# EAGLE board brain_badge (EAGLE 9.5.2)
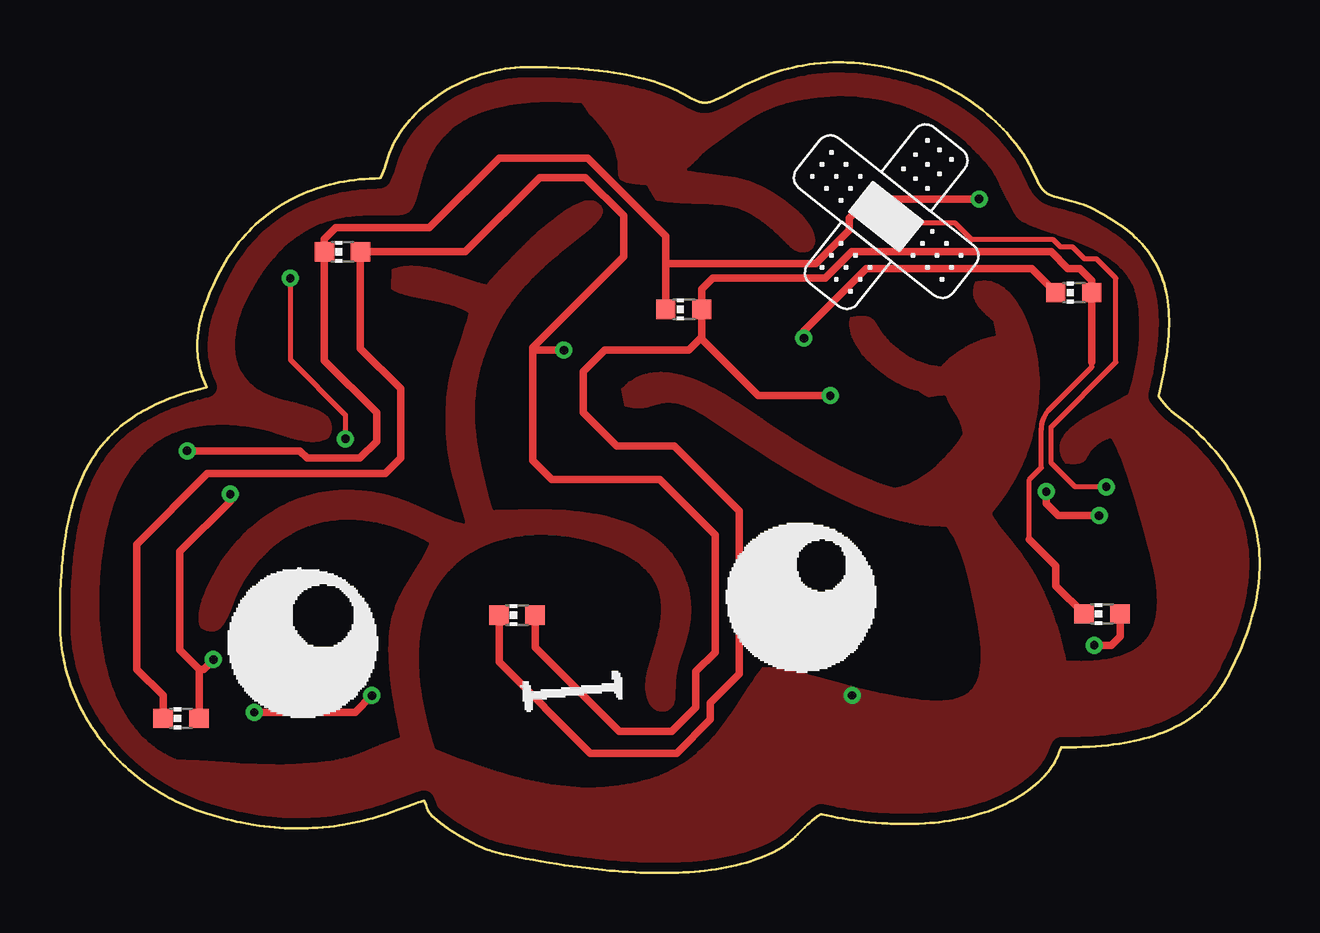
[diagram p0: board, top side]
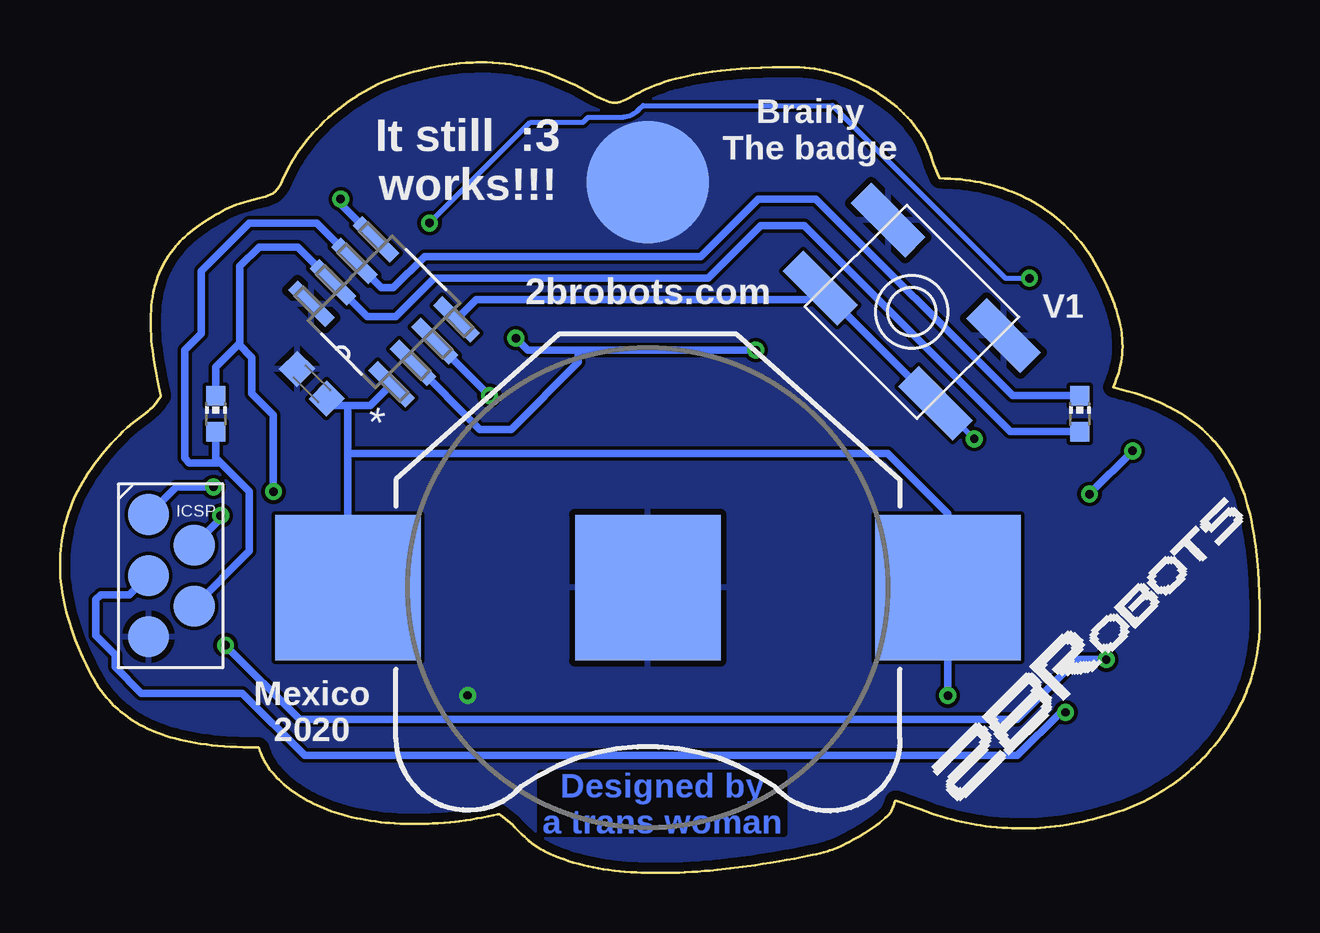
[diagram p1: board, bottom side, seen from below]

Size 49.99 x 33.79 mm. Coordinates in mm from the lower left corner, seen from the top.
Outline: 26.87,32.11 26.82,32.11 26.77,32.12 26.72,32.13 26.66,32.14 26.61,32.16 26.51,32.19 26.42,32.24 26.32,32.29 26,32.46 25.86,32.54 25.72,32.61 25.57,32.68 25.38,32.76 25.18,32.84 24.98,32.91 24.78,32.98 24.58,33.04 24.33,33.11 24.12,33.16 23.86,33.22 23.6,33.28 23.34,33.32 23.08,33.36 22.82,33.4 22.45,33.45 22.03,33.49 21.61,33.52 21.24,33.55 20.76,33.57 20.29,33.58 19.86,33.59 19.39,33.59 19.18,33.59 18.96,33.57 18.75,33.55 18.54,33.52 18.34,33.49 18.13,33.44 17.92,33.39 17.72,33.34 17.52,33.27 17.32,33.21 17.12,33.13 16.92,33.05 16.73,32.96 16.54,32.87 16.35,32.77 16.17,32.67 15.98,32.56 15.81,32.45 15.63,32.33 15.46,32.2 15.29,32.07 15.13,31.94 14.97,31.8 14.82,31.65 14.67,31.5 14.57,31.38 14.47,31.26 14.37,31.13 14.3,31.05 14.24,30.96 14.15,30.83 14.07,30.7 13.99,30.56 13.93,30.47 13.89,30.37 13.84,30.28 13.8,30.18 13.76,30.08 13.73,29.98 13.58,29.53 13.52,29.38 13.48,29.28 13.42,29.14 13.36,28.99 13.33,28.96 13.11,28.96 12.9,28.95 12.69,28.94 12.48,28.92 12.27,28.89 12.06,28.87 11.85,28.83 11.64,28.79 11.44,28.75 11.23,28.7 11.08,28.65 10.88,28.59 10.67,28.53 10.47,28.46 10.33,28.4 10.13,28.32 9.94,28.23 9.75,28.14 9.61,28.06 9.42,27.96 9.24,27.85 9.11,27.77 8.93,27.65 8.76,27.53 8.59,27.4 8.46,27.3 8.3,27.17 8.14,27.03 7.99,26.88 7.88,26.77 7.73,26.61 7.59,26.46 7.46,26.29 7.36,26.17 7.23,26 7.11,25.82 7,25.65 6.89,25.47 6.78,25.28 6.68,25.1 6.54,24.81 6.38,24.48 6.25,24.19 6.15,23.94 6.07,23.75 6.02,23.6 5.98,23.5 5.95,23.4 5.91,23.24 5.85,23.04 5.81,22.83 5.78,22.68 5.75,22.52 5.74,22.41 5.73,22.31 5.72,22.2 5.72,22.1 5.72,21.94 5.72,21.78 5.73,21.62 5.75,21.46 5.77,21.31 5.8,21.15 5.83,21.05 5.85,20.95 5.88,20.84 5.91,20.74 5.97,20.59 6.03,20.45 6.07,20.35 6.11,20.25 6.07,20.24 5.76,20.16 5.45,20.08 5.2,20 4.9,19.9 4.75,19.85 4.6,19.79 4.35,19.69 4.11,19.59 3.97,19.52 3.82,19.45 3.73,19.41 3.59,19.33 3.45,19.25 3.36,19.2 3.27,19.15 3.14,19.06 3,18.97 2.92,18.91 2.83,18.85 2.7,18.76 2.54,18.62 2.38,18.49 2.26,18.38 2.18,18.31 2.03,18.16 1.93,18.04 1.86,17.96 1.72,17.8 1.62,17.67 1.56,17.59 1.44,17.41 1.35,17.28 1.29,17.19 1.24,17.1 1.16,16.96 1.11,16.87 1.04,16.73 0.99,16.64 0.92,16.49 0.86,16.35 0.82,16.25 0.76,16.1 0.72,16 0.63,15.75 0.55,15.5 0.51,15.35 0.47,15.19 0.4,14.94 0.33,14.63 0.3,14.47 0.27,14.26 0.23,14.06 0.2,13.85 0.17,13.64 0.14,13.43 0.11,13.06 0.08,12.79 0.07,12.58 0.04,12.16 0.02,11.69 0.01,11.16 0,10.68 0,10.31 0,10.2 0.01,10.04 0.01,9.94 0.03,9.78 0.05,9.52 0.07,9.36 0.1,9.2 0.13,9.05 0.16,8.89 0.19,8.74 0.23,8.58 0.27,8.43 0.31,8.28 0.36,8.12 0.4,7.97 0.46,7.82 0.51,7.67 0.57,7.53 0.63,7.38 0.72,7.19 0.78,7.04 0.85,6.9 0.93,6.76 1,6.62 1.08,6.48 1.16,6.34 1.24,6.21 1.33,6.07 1.42,5.94 1.51,5.81 1.6,5.68 1.7,5.56 1.79,5.43 1.89,5.31 2.03,5.15 2.17,4.99 2.28,4.87 2.39,4.76 2.5,4.64 2.61,4.53 2.73,4.42 2.85,4.32 2.97,4.21 3.09,4.11 3.21,4.01 3.34,3.91 3.46,3.82 3.59,3.72 3.72,3.63 3.85,3.55 3.99,3.46 4.12,3.38 4.26,3.29 4.4,3.21 4.53,3.14 4.68,3.06 4.82,2.99 4.96,2.92 5.1,2.86 5.25,2.8 5.4,2.74 5.55,2.68 5.69,2.62 5.84,2.57 6.1,2.49 6.3,2.42 6.45,2.38 6.6,2.33 6.81,2.28 6.96,2.24 7.17,2.19 7.37,2.14 7.53,2.11 7.84,2.05 8.05,2.01 8.31,1.97 8.52,1.95 8.73,1.92 8.94,1.9 9.15,1.89 9.36,1.87 9.63,1.86 9.84,1.86 10.05,1.86 10.31,1.87 10.53,1.87 10.74,1.89 10.95,1.9 11.21,1.93 11.42,1.96 11.63,1.99 11.79,2.01 12,2.05 12.2,2.09 12.41,2.13 12.62,2.18 12.82,2.23 13.03,2.29 13.28,2.36 13.43,2.41 13.63,2.47 13.78,2.52 14.13,2.65 14.73,2.87 14.93,2.94 15.03,2.98 15.08,2.99 15.13,3 15.18,3.01 15.21,2.98 15.25,2.82 15.28,2.72 15.3,2.67 15.32,2.62 15.35,2.58 15.38,2.53 15.41,2.49 15.44,2.45 15.48,2.41 15.51,2.37 15.59,2.3 15.84,2.1 15.92,2.03 16.01,1.97 16.18,1.85 16.31,1.76 16.44,1.68 16.58,1.59 16.67,1.54 16.95,1.38 17.09,1.3 17.23,1.23 17.37,1.16 17.46,1.11 17.61,1.05 17.71,1.01 17.81,0.97 17.91,0.94 18.01,0.91 18.16,0.86 18.31,0.82 18.47,0.79 18.62,0.75 18.83,0.71 19.4,0.6 19.71,0.55 20.03,0.49 20.39,0.43 20.71,0.38 21.02,0.33 21.54,0.26 22.07,0.19 22.59,0.13 22.91,0.1 23.12,0.08 23.44,0.06 23.65,0.04 23.97,0.03 24.18,0.02 24.55,0.01 24.92,0 25.24,0 25.39,0 25.77,0.01 25.98,0.02 26.19,0.04 26.45,0.06 26.66,0.08 26.87,0.1 27.14,0.13 27.34,0.16 27.55,0.2 27.76,0.24 27.97,0.28 28.18,0.33 28.38,0.38 28.58,0.44 28.79,0.5 28.99,0.56 29.19,0.64 29.33,0.69 29.53,0.78 29.67,0.84 29.77,0.89 29.86,0.94 29.95,0.99 30.09,1.07 30.18,1.13 30.26,1.19 30.35,1.26 30.47,1.36 30.55,1.43 30.63,1.5 30.74,1.61 31.04,1.91 31.15,2.02 31.23,2.1 31.35,2.2 31.43,2.27 31.56,2.36 31.69,2.45 31.74,2.45 31.95,2.4 32.15,2.36 32.41,2.31 32.62,2.27 32.88,2.23 33.09,2.2 33.35,2.16 33.51,2.14 33.72,2.12 33.99,2.1 34.25,2.08 34.46,2.07 34.62,2.06 34.88,2.05 35.15,2.05 35.36,2.05 35.52,2.05 35.78,2.06 36.05,2.07 36.26,2.09 36.42,2.1 36.63,2.12 36.84,2.15 37.05,2.18 37.26,2.21 37.46,2.25 37.62,2.28 37.83,2.33 37.98,2.37 38.19,2.42 38.39,2.48 38.54,2.53 38.69,2.58 38.84,2.64 38.99,2.7 39.13,2.76 39.28,2.82 39.42,2.89 39.56,2.96 39.7,3.04 39.84,3.12 39.97,3.2 40.11,3.29 40.2,3.34 40.33,3.44 40.45,3.53 40.54,3.6 40.66,3.7 40.78,3.8 40.85,3.88 40.93,3.95 41,4.03 41.11,4.15 41.17,4.23 41.24,4.31 41.3,4.4 41.36,4.49 41.42,4.57 41.47,4.67 41.52,4.76 41.58,4.9 41.62,5 41.66,5.1 41.69,5.2 41.72,5.24 42.09,5.24 42.35,5.25 42.62,5.25 42.88,5.27 43.15,5.28 43.41,5.31 43.67,5.33 43.88,5.36 44.15,5.39 44.35,5.43 44.56,5.46 44.77,5.51 44.98,5.55 45.18,5.6 45.39,5.66 45.59,5.72 45.79,5.79 45.99,5.87 46.13,5.93 46.33,6.01 46.52,6.11 46.66,6.18 46.84,6.29 46.97,6.37 47.15,6.49 47.28,6.58 47.4,6.68 47.49,6.75 47.57,6.82 47.68,6.92 47.76,7 47.83,7.07 47.94,7.19 48.05,7.31 48.15,7.43 48.28,7.6 48.37,7.73 48.48,7.91 48.59,8.09 48.67,8.23 48.79,8.46 48.9,8.7 49.04,8.99 49.13,9.18 49.23,9.42 49.35,9.72 49.44,9.97 49.52,10.22 49.59,10.42 49.66,10.67 49.72,10.88 49.77,11.08 49.82,11.29 49.86,11.5 49.89,11.71 49.92,11.91 49.95,12.12 49.97,12.34 49.98,12.49 49.99,12.71 49.99,12.92 49.99,13.08 49.98,13.29 49.96,13.5 49.94,13.66 49.92,13.87 49.88,14.07 49.84,14.28 49.8,14.44 49.75,14.64 49.69,14.85 49.62,15.05 49.57,15.2 49.49,15.39 49.41,15.59 49.34,15.73 49.25,15.92 49.15,16.11 49.05,16.29 48.94,16.47 48.83,16.65 48.71,16.83 48.59,17 48.46,17.17 48.36,17.3 48.23,17.46 48.13,17.58 47.99,17.74 47.85,17.9 47.67,18.09 47.52,18.25 47.37,18.4 47.18,18.58 47.06,18.68 46.94,18.78 46.85,18.85 46.77,18.91 46.51,19.1 46.43,19.16 46.3,19.26 46.22,19.33 46.15,19.41 46.11,19.45 46.01,19.57 45.91,19.69 45.85,19.78 45.79,19.86 45.78,19.91 45.87,20.27 45.93,20.58 45.98,20.84 46.04,21.16 46.08,21.42 46.1,21.57 46.13,21.78 46.16,21.99 46.18,22.21 46.19,22.42 46.21,22.63 46.21,22.84 46.21,23.05 46.21,23.26 46.19,23.47 46.18,23.63 46.16,23.84 46.13,24 46.09,24.21 46.06,24.36 46.03,24.46 46,24.57 45.96,24.72 45.91,24.87 45.85,25.02 45.78,25.16 45.71,25.3 45.64,25.44 45.56,25.58 45.48,25.72 45.42,25.8 45.35,25.89 45.26,26.02 45.16,26.14 45.09,26.22 44.98,26.33 44.87,26.45 44.79,26.52 44.67,26.62 44.59,26.69 44.47,26.79 44.38,26.86 44.21,26.98 44.08,27.07 43.99,27.13 43.72,27.3 43.5,27.44 43.36,27.52 43.22,27.6 43.08,27.67 42.94,27.74 42.79,27.8 42.65,27.86 42.5,27.91 42.29,27.97 42.14,28.02 41.68,28.13 41.53,28.17 41.42,28.21 41.32,28.24 41.23,28.28 41.18,28.3 41.13,28.33 41.09,28.36 41.05,28.39 41.01,28.42 40.97,28.46 40.93,28.5 40.9,28.54 40.87,28.58 40.81,28.68 40.76,28.77 40.72,28.86 40.47,29.39 40.42,29.48 40.37,29.58 40.29,29.72 40.21,29.85 40.13,29.99 40.04,30.12 39.95,30.25 39.82,30.42 39.69,30.58 39.58,30.7 39.44,30.86 39.3,31.01 39.15,31.16 39,31.31 38.8,31.49 38.64,31.63 38.44,31.8 38.27,31.93 38.06,32.09 37.89,32.21 37.71,32.33 37.53,32.44 37.31,32.58 37.12,32.68 36.94,32.78 36.75,32.88 36.55,32.97 36.36,33.05 36.16,33.12 35.96,33.19 35.66,33.29 35.4,33.36 35.25,33.4 35.05,33.46 34.79,33.52 34.53,33.57 34.22,33.63 33.96,33.68 33.64,33.72 33.49,33.74 33.33,33.75 33.06,33.77 32.8,33.79 32.64,33.79 32.48,33.79 32.22,33.79 31.95,33.78 31.69,33.76 31.43,33.73 31.22,33.71 30.95,33.67 30.75,33.63 30.54,33.58 30.33,33.53 30.08,33.46 29.88,33.4 29.63,33.31 29.43,33.24 29.18,33.14 28.94,33.04 28.75,32.95 28.51,32.83 28.32,32.74 27.62,32.37 27.47,32.3 27.33,32.23 27.23,32.19 27.18,32.17 27.08,32.14 27.03,32.13 26.98,32.12 26.93,32.11 26.87,32.11
Copper layers (1*16): Top 0.0356mm / dielectric 1.5011mm / Bottom 0.0356mm
Design rules "2brobots-2layer": minimum track width 6mil, minimum drill 0.3mm, track to track 6mil, track to pad 6mil, pad to pad 6mil, via to via 6mil, smd to smd 6mil, copper to edge 15mil, drill to drill 6mil, minimum pad ring 7mil, minimum via ring 7mil, stop-mask expansion 2.5mil, vias tented up to drill 50mil, thermal gap 10mil
tRestrict: area 1.7,3.6 to 45.6,32.3

## Footprints (pad centres in the part's own frame; a part is rotated, then mirrored left to right if it is on the bottom)
BATTCON_20MM = smd 6.07 x 6.07: 1 -12.5,0; 2 0,0; 3 12.5,0
C0603K = smd 1.05 x 1.08: 1 -0.875,0; 2 0.875,0
CHIP-LED0603 = smd 0.8 x 0.8: A 0,-0.75; C 0,0.75
EVQ-Q2 = smd 3.2 x 1.2: A -3.4,-2; A' 3.4,-2; B -3.4,2; B' 3.4,2
SOIC127P600X175-8N = smd 2.184 x 0.559: 1 -2.362,1.905; 2 -2.362,0.635; 3 -2.362,-0.635; 4 -2.362,-1.905; 5 2.362,-1.905; 6 2.362,-0.635; 7 2.362,0.635; 8 2.362,1.905
ICSP_POGO = smd 1.7 x 1.7: P$1 -2.55,0; P$2 0,0; P$3 2.55,0; P$4 -1.275,1.9; P$5 1.275,1.9
BUTTERFLY_CLUTCH = smd 5.1 x 5.1: P$1 0,0

## Placement (x,y rotation side)
BT1  [BATTCON_20MM]  25.49,11.9 180 bottom
C1  100nF  [C0603K]  39.49,20.4 135 bottom
LED1  [CHIP-LED0603]  43.42,10.8 90 top
LED2  [CHIP-LED0603]  42.24,24.2 90 top
LED3  [CHIP-LED0603]  25.99,23.5 90 top
LED4  [CHIP-LED0603]  19.04,10.75 90 top
LED5  [CHIP-LED0603]  5.04,6.45 90 top
LED6  [CHIP-LED0603]  11.77,25.9 90 top
LED7  [CHIP-LED0603]  7.49,19.15 0 bottom
LED8  [CHIP-LED0603]  43.49,19.15 0 bottom
SW1  SPST_TACT-EVQQ2  [EVQ-Q2]  14.49,23.4 315 bottom
U1  PIC12F1822-E/SN  [SOIC127P600X175-8N]  36.49,23.4 135 bottom
U$1  ICSP_POGO  [ICSP_POGO]  46.29,12.4 270 bottom
U$2  BUTTERFLY_CLUTCH  [BUTTERFLY_CLUTCH]  25.49,28.8 0 bottom

## Library data of the parts
BT1 = SparkFun-Batteries; PROD_ID: BATT-11519
C1 LED1-LED8 SW1 = adafruit
U1 = Microchip-PIC12F1822-E_SN; MPN: PIC12F1822-E/SN; OC_FARNELL: 2315760; OC_NEWARK: 53R0195; PACKAGE: SOIC-8; SUPPLIER: Microchip
U$1 = ICSP_POGO
U$2 = butterfly_clutch

## Nets
3V: BT1.1 BT1.3 C1.1 U1.1 U$1.P$2
A0: LED7.A LED8.C U1.7 U$1.P$4
A1: LED7.C LED8.A U1.6 U$1.P$5
A2: LED1.A LED3.C LED5.A LED6.C U1.5
A3: SW1.A SW1.A' U1.4 U$1.P$1
A4: LED1.C LED2.A LED3.A LED4.C U1.3
A5: LED2.C LED4.A LED5.C LED6.A U1.2
GND: BT1.2 C1.2 SW1.B SW1.B' U1.8 U$1.P$3 U$2.P$1

## Tracks (layer width: path | path; a pad name or v marks a point on that pad's centre or on a via)
3V  (via drill 0.35)
  Top 0.305: v8.09,6.7 12.29,6.7 v12.99,7.4
  Bottom 0.305: C1.1 38.59,19.5 37.99,19.5 | U1.1 37.05,19.5 37.99,19.5 | BT1.3 37.99,17.5 | 37.99,17.5 37.99,19.5 | 37.99,17.5 15.49,17.5 12.99,15 BT1.1 v12.99,7.4 | U$1.P$2 47.09,11.6 48.29,11.6 48.49,11.4 48.49,9.9 47.69,9.1 47.69,8.6 46.59,7.5 42.39,7.5 39.79,4.9 10.09,4.9 8.29,6.7 v8.09,6.7
A0  (via drill 0.35)
  Top 0.305: v43.29,14.9 41.59,14.9 41.09,15.4 v41.09,15.9
  Bottom 0.305: 42.54,22.05 42.49,22.1 42.49,25.3 41.69,26.1 40.09,26.1 U1.7 37.19,23.2 35.99,23.2 34.39,24.8 22.97,24.8 20.79,26.98 18.97,26.98 10.39,18.4 LED7.A | 42.54,22.05 43.49,21.1 LED8.C | v43.29,14.9 43.29,14.77 U$1.P$4 | v41.09,15.9 41.09,17 41.09,19.1 41.99,20 41.99,21.5 42.54,22.05
A1
  Bottom 0.305: U$1.P$5 42.09,13.42 42.09,15.9 43.29,17.1 | LED8.A 43.49,17.3 43.29,17.1 | 43.29,17.1 44.59,17.1 44.79,17.3 44.79,21.8 44.09,22.5 44.09,25.1 42.09,27.1 39.3,27.1 U1.6 36.6,24.4 36.09,24.4 34.79,25.7 23.29,25.7 20.89,28.1 18.49,28.1 10.29,19.9 LED7.C
A2  (via drill 0.35)
  Top 0.305: 25.24,25.4 25.24,26.55 21.99,29.8 18.29,29.8 15.39,26.9 11.49,26.9 11.02,26.42 LED6.C 11.02,21.37 13.19,19.2 13.19,18 12.49,17.3 10.29,17.3 9.99,17.6 v5.29,17.6 | 25.24,25.4 LED3.C | LED5.A 5.79,8.5 | 5.79,8.5 4.99,9.3 4.99,13.4 7.09,15.5 v7.09,15.8 | v38.29,28.1 33.69,28.1 32.89,27.3 32.89,26.8 31.49,25.4 25.24,25.4 | LED1.A 44.17,9.87 43.79,9.5 v43.09,9.5 | v6.39,8.9 5.99,8.5 5.79,8.5
  Bottom 0.305: v7.09,15.8 v5.29,17.6 | U1.5 38.29,27.89 v38.29,28.1 | v43.09,9.5 39.99,6.4 10.09,6.4 7.59,8.9 v6.39,8.9
A3  (via drill 0.35)
  Top 0.203: v43.59,16.1 42.29,16.1 41.29,17.1 41.29,18.6 43.99,21.3 43.99,24.8 43.19,25.6 42.69,25.6 42.19,26.1 41.69,26.1 41.39,26.4 37.99,26.4 37.29,27.1 v34.59,27.1 | v11.89,18.1 11.89,19.1 9.59,21.4 v9.59,24.8
  Bottom 0.203: v34.59,27.1 30.39,31.3 28.19,31.3 27.99,31.5 26.62,31.5 arc-45 25.89,31.8 25.69,32 17.79,32 10.59,24.8 v9.59,24.8 | v11.89,18.1 13.38,19.58 SW1.A'
  Bottom 0.305: U1.4 32.65,23.9 18.8,23.9 SW1.A | U$1.P$1 45.14,16.1 v43.59,16.1 | SW1.A' SW1.A | SW1.A
A4  (via drill 0.35)
  Top 0.203: 40.39,13.9 40.39,16.4 40.89,16.9 40.89,18.5 arc-45 41.25,19.35 42.99,21.1 42.99,21.4
  Top 0.305: LED1.C 41.49,11.97 41.49,12.8 40.39,13.9 | 42.99,21.3 42.99,21.4 LED2.A 42.99,24.7 42.49,25.2 41.99,25.2 41.29,25.9 32.99,25.9 31.89,24.8 27.19,24.8 26.74,24.35 LED3.A 26.74,22.35 26.69,22.3 | 26.69,22.3 26.19,21.8 22.69,21.8 21.79,20.9 21.79,19.2 23.19,17.8 25.59,17.8 28.29,15.1 28.29,8.3 27.09,7.1 27.09,6.4 25.69,5 22.09,5 18.29,8.8 LED4.C | v32.09,19.9 29.09,19.9 26.69,22.3
  Bottom 0.305: U1.3 v32.1,19.9 v32.09,19.9
A5  (via drill 0.35)
  Top 0.305: LED5.C 4.29,7.4 3.19,8.5 3.19,13.7 6.14,16.65 13.54,16.65 14.19,17.3 14.19,20.2 12.52,21.87 LED6.A 16.89,25.9 19.99,29 21.89,29 23.49,27.4 23.49,25.7 19.69,21.9 | LED4.A 19.79,9.4 23.29,5.9 25.49,5.9 26.49,6.9 26.49,8.4 27.29,9.2 27.29,14.1 24.99,16.4 20.49,16.4 19.69,17.2 19.69,21.9 | LED2.C 40.49,25.2 33.59,25.2 30.99,22.6 v30.99,22.3 | v20.99,21.8 19.79,21.8 19.69,21.9
  Bottom 0.305: v30.99,22.3 30.49,21.8 28.39,21.8 | 28.39,21.8 v20.99,21.8 | U1.2 32.49,18.5 31.19,18.5 28.39,21.3 28.39,21.8
GND  (via drill 0.35)
  other vias: 33.01,7.41
  pour Bottom: -0.76,34.4 -0.76,-0.6 50.74,-0.6 50.74,34.4
  pour Top: -0.76,34.48 -0.76,-0.52 50.74,-0.52 50.74,34.48

## Text on the board
Bottom: Designed by / a trans woman
bPlace: Brainy / The badge | It still :3 / works!!! | 2brobots.com | V1 | Mexico / 2020
bStop: @dannimakes | Thank you!!! / n ‿ n